# Altium PCB panel.PcbDoc (part 3 of 3)
Units mm, origin at the board's own origin, x right, y up, seen from the top; angles counter-clockwise.
Board outline 152.4 x 101.6 mm, 2 copper layers (Top Layer, Bottom Layer); 276 components, 0 nets, 996 pads, 236 vias.
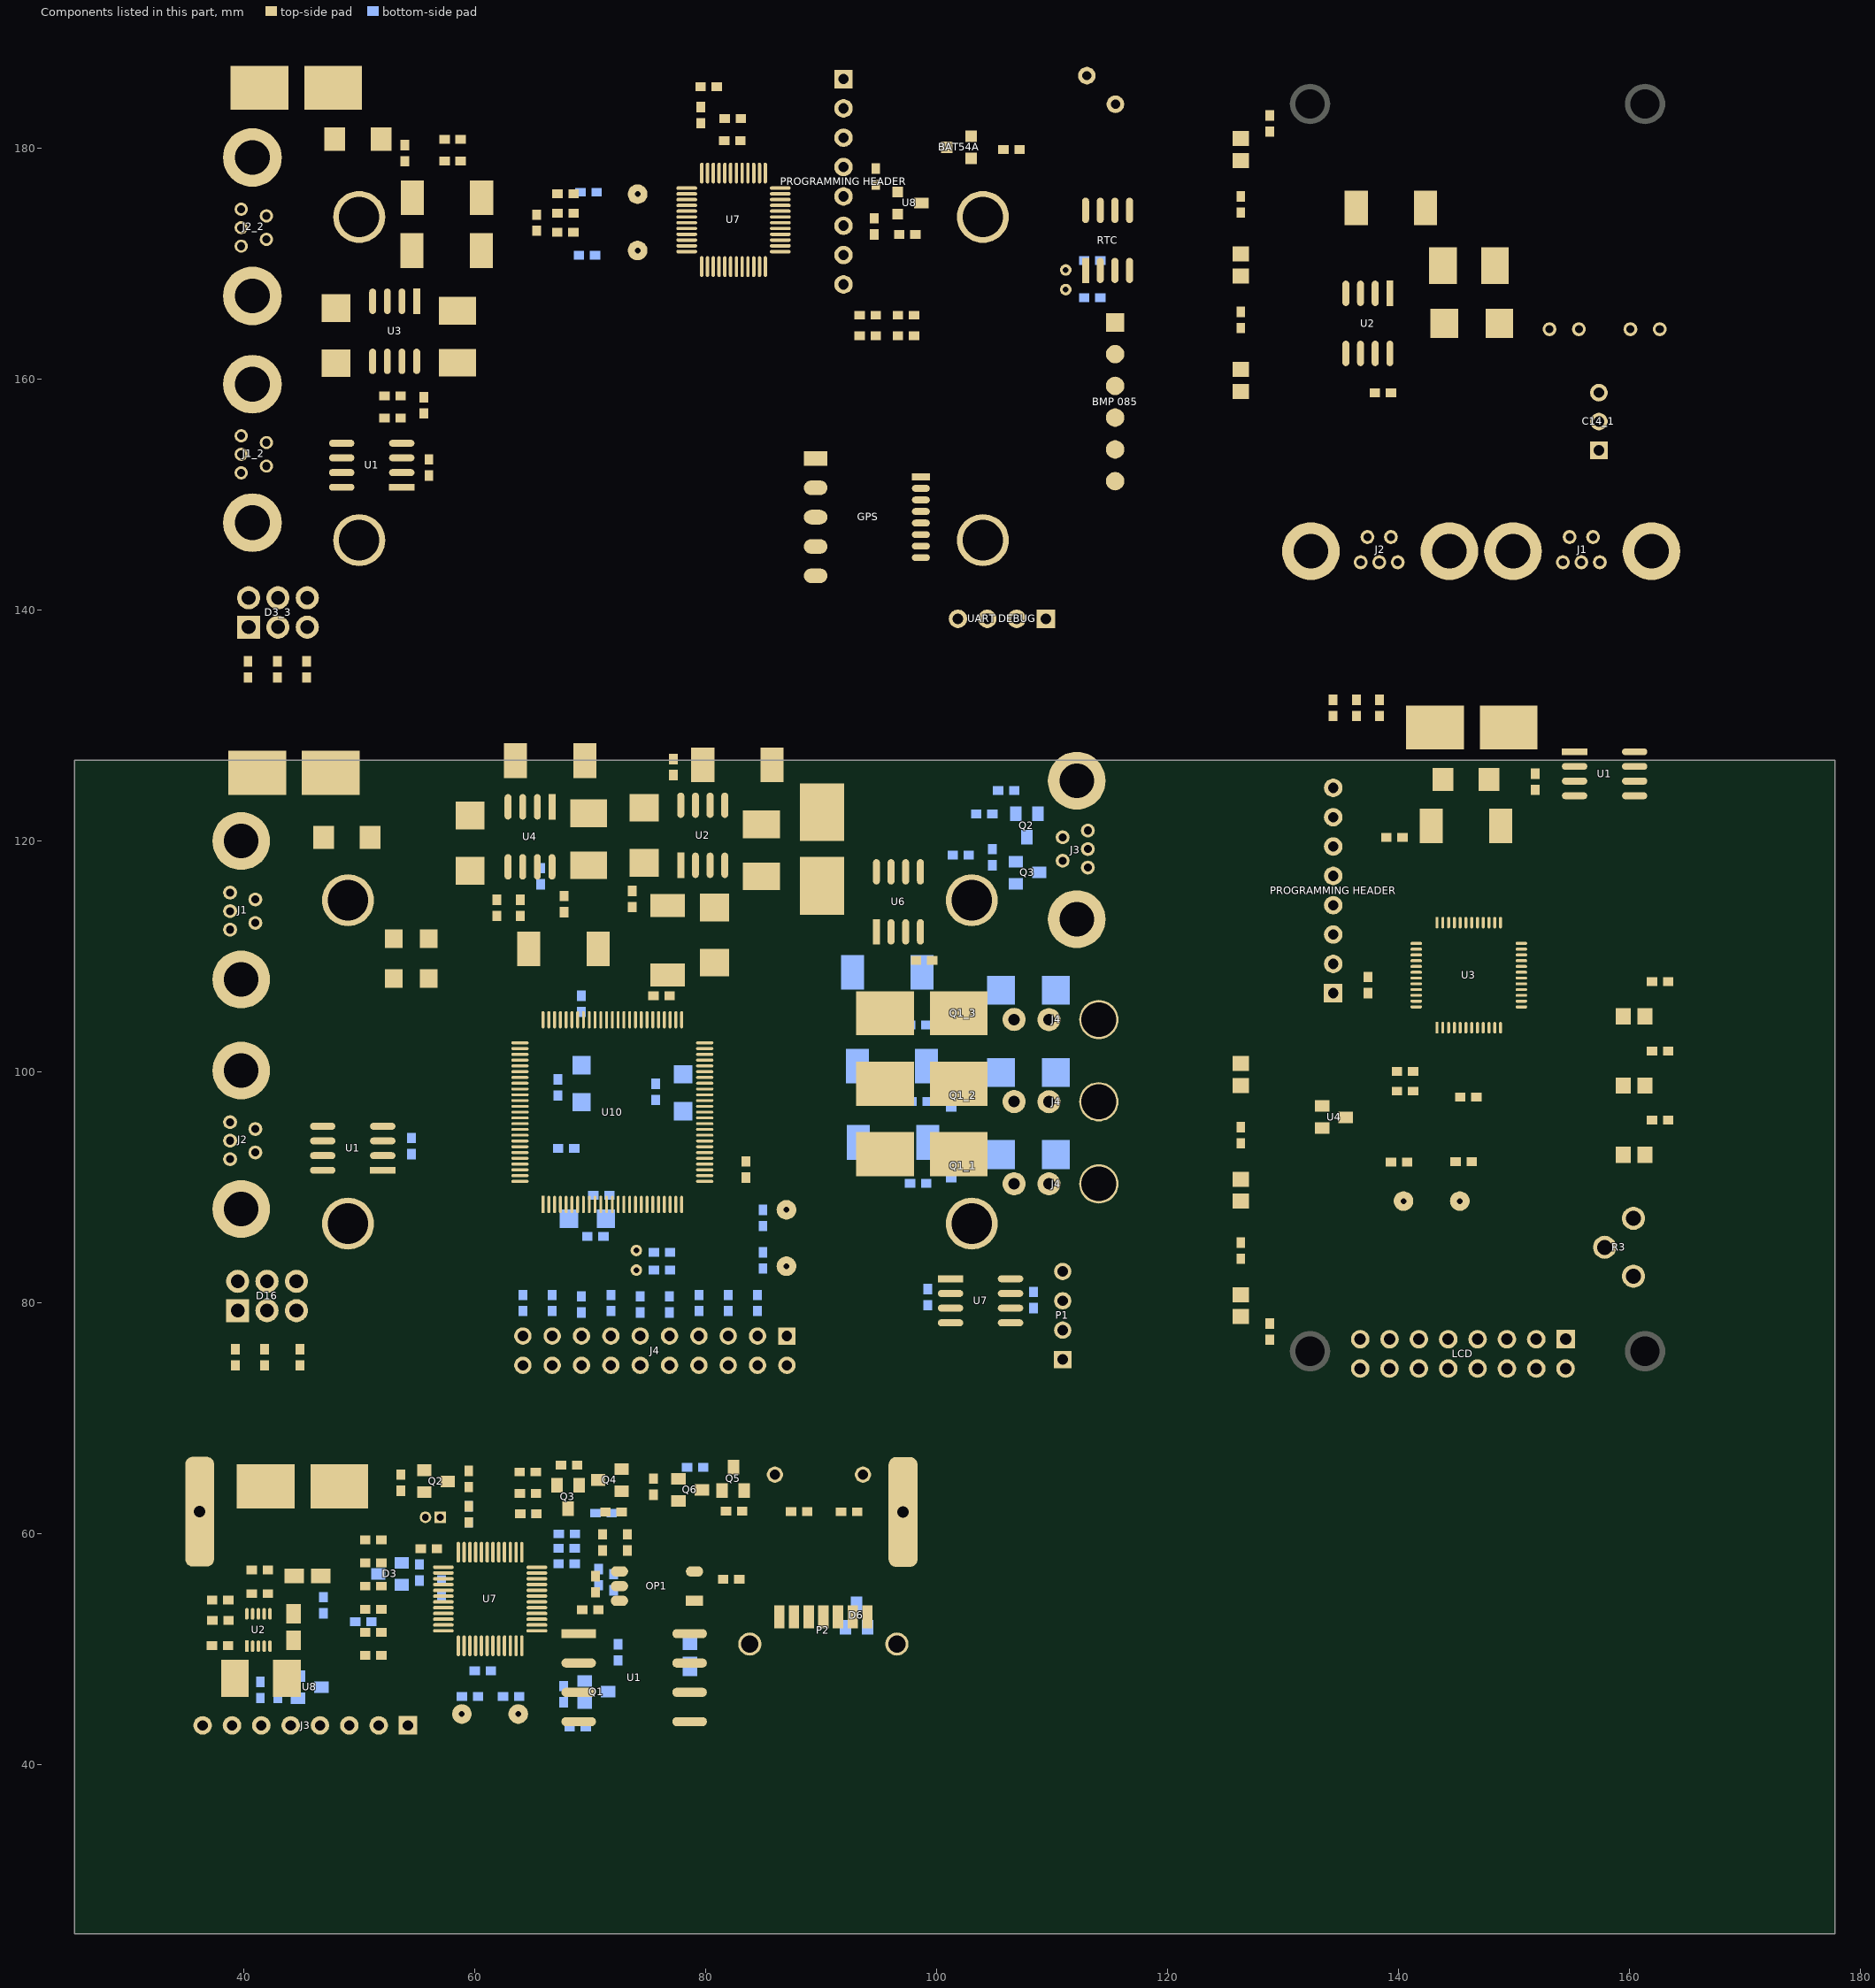
[diagram p3: the components of this part, seen from the top]

## Silkscreen, mask and mechanical layers (free items; w line width, h text height) (continued)
Top Solder:
  rectangle: 93.898,152.256 95.898,153.456
  rectangle: 93.898,142.656 95.898,143.856
Mechanical 1:
  circle w0.254: c152.405,59.054 r6.6
  circle w0.254: c104.023,146.056 r1.602
  circle w0.254: c50.023,174.056 r1.602
  circle w0.254: c103.057,86.875 r1.602
  circle w0.254: c103.057,114.875 r1.602
  circle w0.254: c49.057,114.875 r1.602
  circle w0.254: c49.057,86.875 r1.602
  lines w0.254: 34.727,72.57 34.727,129.18 52.307,129.18 52.307,125.87 ; 34.732,72.575 52.307,72.575 52.307,75.885 cw(c55.622,75.885) 58.937,75.885 58.937,72.575 93.177,72.575 93.177,75.885 cw(c96.492,75.885) 99.807,75.885 99.807,72.575 ; 35.693,131.751 35.693,188.361 53.273,188.361 53.273,185.051 ; 35.698,131.756 53.273,131.756 ; 52.307,125.865 ccw(c55.622,125.865) 58.937,125.865 58.937,129.175 93.177,129.175 93.177,125.865 ccw(c96.492,125.865) 99.807,125.865 99.807,129.175 117.382,129.175 ; 53.273,185.046 ccw(c56.588,185.046) 59.903,185.046 59.903,188.356 94.143,188.356 ; 53.298,131.756 53.298,135.066 cw(c56.613,135.066) 59.928,135.066 ; 59.903,131.756 94.143,131.756 ; 59.928,131.751 59.928,135.061 ; 94.143,185.046 ccw(c97.458,185.046) 100.773,185.046 100.773,188.356 118.348,188.356 ; 94.198,131.756 94.198,135.066 cw(c97.513,135.066) 100.828,135.066 ; 99.812,72.57 117.387,72.57 117.387,129.18 ; 100.778,131.751 118.353,131.751 118.353,188.361 ; 100.828,131.751 100.828,135.061 ; 119.38,50.804 119.38,62.054 ; 119.414,50.804 141.664,50.804 141.664,62.054 119.414,62.054 ; 34.672,41.991 34.672,66.991 98.672,66.991 98.672,41.991 34.672,41.991 ; 103.964,44.604 163.964,44.604 163.964,67.304 136.974,67.304 103.964,67.304 103.964,44.604 ; 106.164,50.804 117.856,50.804 117.856,55.054 106.164,55.054 106.164,50.804 ; 123.352,76.828 128.352,71.828 165.352,71.828 165.352,187.828 128.352,187.828 123.352,182.828 123.352,157.828 127.352,153.828 127.352,105.828 123.352,101.828 123.352,76.828

## Text inside footprints (layer, text, board x,y; h text height)
ID?: Top Overlay "ID" at 158.752,178.678 h1.52 r180
J1: Top Overlay "131-040" at 44.385,111.724 h0.8 r90
J1: Bottom Overlay "131-040" at 153.626,149.681 h0.76 r180
J2: Top Overlay "131-040" at 44.385,91.849 h0.8 r90
J2: Bottom Overlay "131-040" at 136.126,149.681 h0.76 r180
J3: Top Overlay "131-040" at 107.579,121.521 h0.8 r270
J4: Top Overlay "20" at 61.06,74.32 h0.8; Top Overlay "19" at 61.167,76.783 h0.8; Top Overlay "1" at 88.947,76.89 h0.8; Top Overlay "2" at 88.947,74.053 h0.8